# Allegro board GL850_HUB_V10A.brd
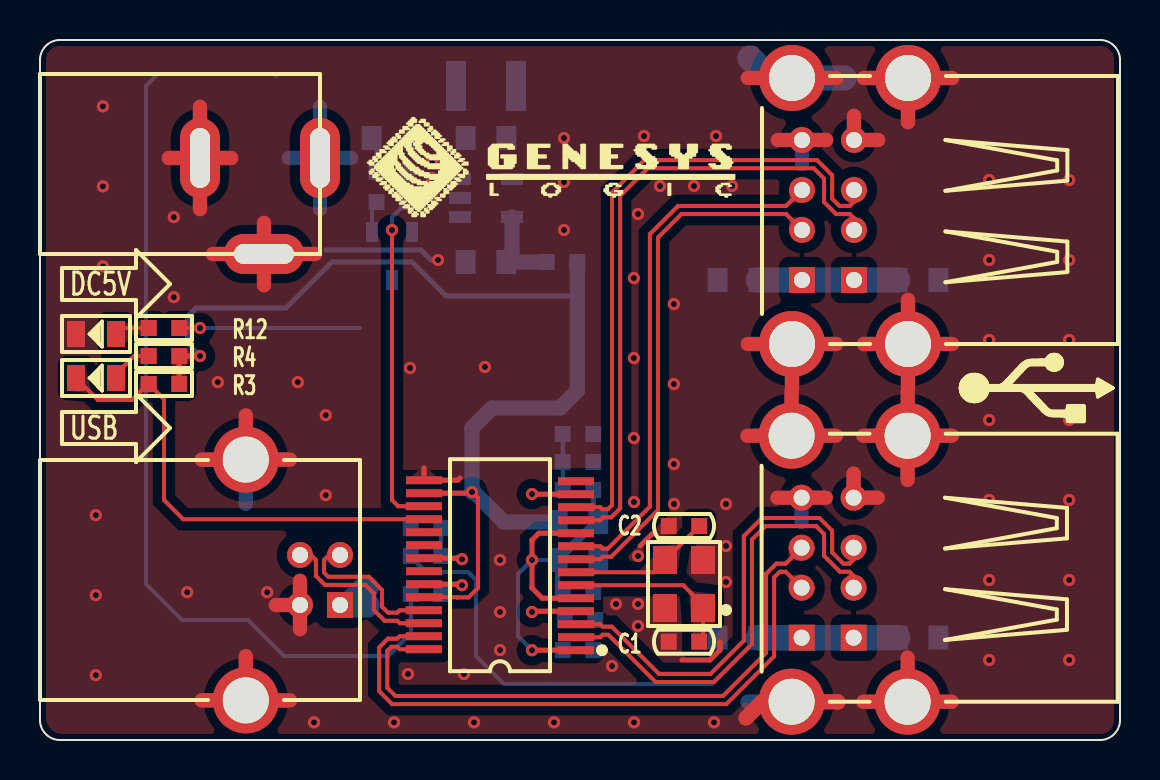
[diagram p0: board, top side]
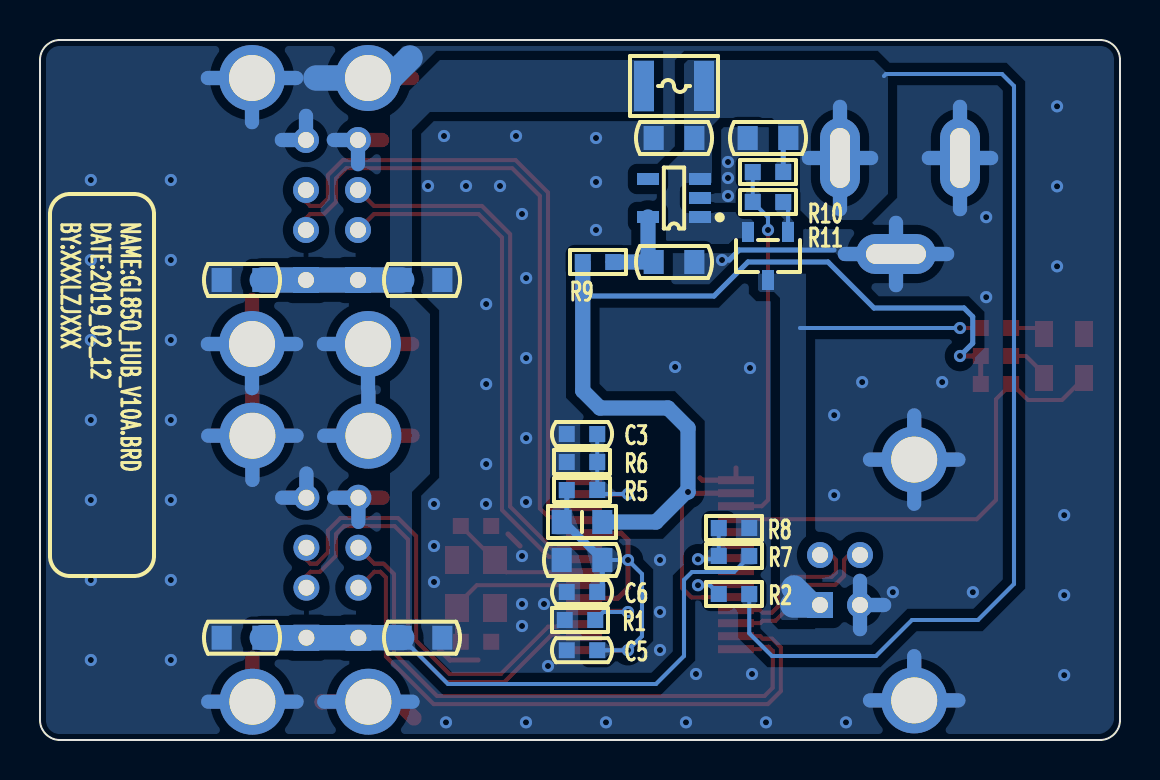
[diagram p1: board, bottom side, seen from below]

Outline 54 x 35 mm; copper layers: TOP, BOTTOM. Coordinates in mm from the lower left corner of the outline.
Outline path: 0,34 arc(0.29,34.71) 1,35 53,35 arc(53.71,34.71) 54,34 54,1 arc(53.71,0.29) 53,0 1,0 arc(0.29,0.29) 0,1 0,34

## Design rules (mm)
constraint set DEFAULT: min track width 0.203, pair gap 0.203
net group DP1: nets DM0 DP0
net group DP2: nets DM1 DP1
net group DP3: nets DM2 DP2
net group DP4: nets DM3 DP3
net group DP5: nets DM4 DP4

## Placement (name value [footprint] x y rotation side)
C1  20pF_25V  [C0603]  32.2 4.91 0 top
C2  20pF_25V  [C0603]  32.2 10.7 0 top
C3  0.1uF_25V  [C0603]  26.9 15.3 180 bottom
C4  10uF_25V  [C0805]  26.9 9 0 bottom
C5  0.1uF_25V  [C0603]  26.9 4.49 180 bottom
C6  0.1uF_25V  [C0603]  26.9 7.4 180 bottom
C7  10uF_25V  [C0805]  34.9 23 180 bottom
C8  10uF_25V  [C0805]  43.9 23 0 bottom
C9  10uF_25V  [C0805]  34.9 5.11 180 bottom
C10  10uF_25V  [C0805]  43.9 5.11 0 bottom
C11  10uF_25V  [C0805]  17.6 30.1 0 bottom
C12  10uF_25V  [C0805]  22.3 30.1 0 bottom
C13  10uF_25V  [C0805]  22.3 23.9 180 bottom
D1  LED_GREEN  [LED0805]  2.8 18.1 180 top
D2  LED_GREEN  [LED0805]  2.8 20.3 180 top
DC1  -  [DC005]  8 29.1 0 top
F1  SMD1210-200  [FUSE1210]  22.3 32.7 180 bottom
L1  BLM21PG600  [L0805]  26.9 10.9 180 bottom
NOREF  -  []  0 0 90 top
NOREF#2  -  []  0 0 0 top
Q1  AO3415  [SOT23-3]  17.6 24.2 0 bottom
R1  680R  [R0603]  27 6 180 bottom
R2  0R/NI  [R0603]  19.3 7.3 180 bottom
R3  100K  [R0603]  6.2 17.8 0 top
R4  10K  [R0603]  6.2 19.2 0 top
R5  10K  [R0603]  26.9 12.5 180 bottom
R6  47K  [R0603]  26.9 13.9 180 bottom
R7  30K  [R0603]  19.3 9.2 180 bottom
R8  30K  [R0603]  19.3 10.6 0 bottom
R9  0R  [R0603]  26.1 23.9 0 bottom
R10  510K  [R0603]  17.6 28.4 180 bottom
R11  4.7K  [R0603]  17.6 26.9 180 bottom
R12  10K  [R0603]  6.2 20.6 0 top
U1  X322512MSB4SI  [X-4P-3R2X2R5-SMD]  32.2 7.8 90 top
U2  GL850G  [SSOP28]  23 8.74 90 top
U3  SPX3819M5-L-3-3/TR  [SOT23-5]  22.3 27.1 90 bottom
USB1  -  [USB-A-DOUBLE]  38.1 26.5 0 top
USB2  -  [USB-A-DOUBLE]  38.08 8.61 0 top
USB3  -  [USB-B]  15 8 180 top

## Library data of the parts
C1 C2 C7-C13 = CAP NP_2
C3 C5 C6 = CAP NP
C4 = C_Generic
D1 D2 = LED_4
DC1 = DC005
F1 = FUSE
L1 = IND_BEAD_0805_600OHM_200MA
Q1 = MOS-P_0
R1-R12 = R_Generic
U1 = TSX-3225
U2 = GL850G
U3 = SPX3819M5-L-1-2
USB1 USB2 = USB-A-DOUBLE
USB3 = USB-B

## Footprints (pads in the part's own frame, mm; a bottom-side part is the same pattern mirrored in y, then rotated)
C0603
  rect 0.8x0.8 smd: 1(-0.762,0) 2(0.762,0)
C0805
  rect 1x1.2 smd: 1(-1.016,0) 2(1.016,0)
DC005
  oval 2x4 hole 1x3: 1(6,0) 2(0,0)
  oval 4x2 hole 3x1: 3(3.2,-4.8)
FUSE1210
  rect 1x2.5 smd: 1(-1.5,0) 2(1.5,0)
L0805
  rect 1x1.2 smd: 1(-1.016,0) 2(1.016,0)
LED0805
  rect 0.9x1.3 smd: 1(-1,0) 2(1,0)
R0603
  rect 0.8x0.8 smd: 1(-0.762,0) 2(0.762,0)
SOT23-3
  rect 0.6x1 smd: 1(-1,-1.2) 2(1,-1.2) 3(0,1.2)
SOT23-5
  rect 0.6x1.1 smd: 1(-0.95,-1.3) 2(0,-1.3) 3(0.95,-1.3) 4(0.95,1.3) 5(-0.95,1.3)
SSOP28
  rect 0.4x1.8 smd: 1(-4.25,-3.8) 2(-3.6,-3.8) 3(-2.95,-3.8) 4(-2.3,-3.8) 5(-1.65,-3.8) 6(-1,-3.8) 7(-0.35,-3.8) 8(0.3,-3.8) 9(0.95,-3.8) 10(1.6,-3.8) 11(2.25,-3.8) 12(2.9,-3.8) 13(3.55,-3.8) 14(4.2,-3.8) 15(4.25,3.8) 16(3.6,3.8) 17(2.95,3.8) 18(2.3,3.8) 19(1.65,3.8) 20(1,3.8) 21(0.35,3.8) 22(-0.3,3.8) 23(-0.95,3.8) 24(-1.6,3.8) 25(-2.25,3.8) 26(-2.9,3.8) 27(-3.55,3.8) 28(-4.2,3.8)
USB-A-DOUBLE
  rect 1.3x1.3 hole 0.8: 1(2.6,-3.5) 5(0,-3.5)
  round 1.3 hole 0.8: 2(2.6,-1) 3(2.6,1) 4(2.6,3.5) 6(0,-1) 7(0,1) 8(0,3.5)
  round 3.3 hole 2.3: 9(-0.5,6.6) 10(5.3,6.6) 11(5.3,-6.7) 12(-0.5,-6.7)
USB-B
  rect 1.3x1.3 hole 0.8: 1(0,1.25)
  round 1.3 hole 0.8: 2(0,-1.25) 3(2,-1.25) 4(2,1.25)
  round 3.3 hole 2.3: 5(4.71,6.02) 6(4.71,-6.02)
X-4P-3R2X2R5-SMD
  rect 1.4x1.2 smd: 1(-1.2,-0.95) 2(1.2,-0.95) 3(1.2,0.95) 4(-1.2,0.95)

## Nets
AVDD: C4.1 C5.2 C6.2 L1.1 R5.1 U2.1 U2.5 U2.10
DVDD: L1.2(B) R3.2 R4.2 R9.2 U2.16 U2.24
GND: C1.1 C2.1 C3.1 C4.2 C5.1 C6.1 C7.2 C8.2 C9.2 C10.2 C11.2 C12.2 C13.2 D2.2(CATHODE) DC1.2 DC1.3 R1.1 R6.1 R8.1 U1.2 U1.4 U2.15 U3.2 USB1.4 USB1.8 USB1.9 USB1.10 USB1.11 USB1.12 USB2.4 USB2.8 USB2.9 USB2.10 USB2.11 USB2.12 USB3.4 USB3.5 USB3.6
VCC: C11.1 C12.1 DC1.1 F1.2 Q1.2(S) R2.2 R10.2 U3.1 U3.3
VCC_VOUT1: C7.1 C8.1 C9.1 C10.1 F1.1 R7.2 USB1.1 USB1.5(VCC_2) USB2.1 USB2.5(VCC_2)
B_VCC: Q1.3 R12.2 USB3.1(VBUS)
DM0: U2.25 USB3.2
DM1: U2.27 USB2.6
DM2: U2.2 USB2.2
DM3: U2.8 USB1.6
DM4: U2.11 USB1.2
DP0: U2.26 USB3.3
DP1: U2.28 USB2.7
DP2: U2.3 USB2.3
DP3: U2.9 USB1.7
DP4: U2.12 USB1.3
OC1#: R7.1 R8.2 U2.21
PGANG: D1.2(CATHODE) R3.1 U2.18
PSELF: R10.1 R11.1 U2.17
RESET#: C3.2 R5.2 R6.2 U2.13
X1: C1.2 U1.1 U2.6
X2: C2.2 U1.3(OUT2) U2.7(X2)
N16723357: C13.1 R9.1 U3.5(VOUT)
N16762604: D2.1 R12.1
N16767407: R2.1 U2.23
N16767619: R1.2 U2.4
N16774538: Q1.1 R11.2
N16775290: D1.1 R4.1

Pads without a net: U2 14 19 20 22; U3 4

## Via types
v1: diameter 0.61, hole 0.305, TOP to BOTTOM, 80 vias

## Routing (per net, layer and track width the routed paths; a pad name or vN(x,y) marks a point on that pad's centre or on a via; arc(x,y) is an arc through that point)
AVDD: length 23.5
  TOP w0.254: U2.5 25.11,7.09 24.6,7.6 v1(24.6,9) 24.6,10 24.94,10.34 U2.10 ; U2.1 v1(24.6,4.49)
  BOTTOM w0.203: C4.1 v1(24.6,9) 23.9,8.3 23.9,5.19 v1(24.6,4.49) C5.2
  BOTTOM w0.254: C4.1 25.88,7.65 C6.2 ; R5.1 27.66,11.25 27.92,11 L1.1
  BOTTOM w0.4: C4.1 27.78,10.9 L1.1
DVDD: length 56.8
  TOP w0.203: v1(21.6,12.4) 21.9,12.1 21.9,7.6 21.43,7.13 20.85,7.13 20.84,7.14 U2.24
  TOP w0.254: R3.2 R4.2 v1(8,19.2) ; v1(21.6,12.4) 21.54,12.34 U2.16
  BOTTOM w0.254: v1(8,19.2) 7.37,19.84 7.37,21.16 7.8,21.6 12.3,21.6 14.6,23.9 18.6,23.9 20.3,22.2 26.86,22.2
  BOTTOM w0.762: R9.2 26.86,17.46 26,16.6 22.6,16.6 21.6,15.6 v1(21.6,12.4) 21.7,12.4 23.2,10.9 L1.2
GND: length 196.1
  TOP w0.254: 19.2,13.6 U2.15 20.89,12.99 21,13.1 ; 34,4.9 34,4.5 33.5,4 32.1,4 ; 30.6,10.3 30,9.7
  TOP w0.711: 41.89,12.11 USB2.4 40.68,13.32 ; 8.08,1.98 USB3.5 ; USB3.5 10.29,4.19 ; USB3.5 12.5,1.98 ; USB2.11 43.38,4.12 ; USB2.11 45.59,1.91 ; USB2.11 41.17,1.91 ; 8.08,14.02 USB3.6 ; USB3.6 10.29,16.23 ; USB3.6 12.5,14.02 ; 8,26.54 DC1.2 ; DC1.2 6.44,29.1 ; DC1.2 8,31.66 ; DC1.2 9.56,29.1 ; 35.39,33.1 USB1.9 39.81,33.1 ; 40.7,31.21 USB1.4 41.91,30 ; USB1.10 45.61,33.1 ; USB1.10 43.4,30.89 ; USB1.10 41.19,33.1 ; 8.64,24.3 DC1.3 ; DC1.3 11.2,22.74 ; DC1.3 13.76,24.3 ; DC1.3 11.2,25.86 ; 35.37,15.21 USB2.9 ; USB2.9 39.79,15.21 ; USB2.9 37.58,17.42 ; 13,5.54 USB3.4 ; USB3.4 11.79,6.75 ; USB3.4 13,7.96 ; USB2.10 43.38,17.42 ; USB2.10 43.38,13.01 ; USB2.10 45.59,15.21 ; USB2.10 41.17,15.21 ; 41.19,19.8 USB1.11 ; USB1.11 43.4,17.59 ; USB1.11 45.61,19.8 ; USB1.11 43.4,22.01 ; 35.39,19.8 USB1.12 ; USB1.12 37.6,17.59 ; USB1.12 39.81,19.8 ; 39.31,30 USB1.8 36.89,30 ; 39.29,12.11 USB2.8 36.87,12.11
  TOP w0.762: 35.3,1.1 36.11,1.91 USB2.12 39.89,1.91 39.9,1.9
  BOTTOM w0.254: 14.3,24.5 19.04,24.5 19.54,24 v1(19.9,24)
  BOTTOM w0.711: 37.6,17.59 USB1.12 39.81,19.8 ; 10.29,11.81 USB3.6 ; USB3.6 12.5,14.02 ; USB3.6 8.08,14.02 ; USB3.6 10.29,16.23 ; USB2.10 45.59,15.21 ; USB2.10 43.38,13.01 ; USB2.10 41.17,15.21 ; 39.79,1.91 USB2.12 35.37,1.91 ; 40.68,13.32 USB2.4 41.89,12.11 ; 39.29,12.11 USB2.8 38.08,10.91 ; 41.19,19.8 USB1.11 ; USB1.11 43.4,17.59 ; USB1.11 45.61,19.8 ; 6.44,29.1 DC1.2 ; DC1.2 8,31.66 ; DC1.2 8,26.54 ; DC1.2 9.56,29.1 ; USB3.5 12.5,1.98 ; USB3.5 8.08,1.98 ; USB3.5 10.29,4.19 ; 41.17,1.91 USB2.11 45.59,1.91 ; DC1.3 13.76,24.3 ; DC1.3 11.2,22.74 ; DC1.3 11.2,25.86 ; DC1.3 8.64,24.3 ; 11.79,6.75 USB3.4 ; USB3.4 13,7.96 ; USB3.4 13,5.54 ; USB1.10 45.61,33.1 ; USB1.10 41.19,33.1 ; USB1.10 43.4,30.89 ; 40.7,31.21 USB1.4 41.91,30 ; 39.79,15.21 USB2.9 37.58,17.42 ; 39.31,30 USB1.8 38.1,28.79
  BOTTOM w1.27: 35.5,34.1 36.5,33.1 USB1.9 40.2,33.1
  vias: v1(2.79,11.24) v1(2.79,7.24) v1(2.79,3.24) v1(3.15,31.68) v1(3.15,27.68) v1(3.15,23.68) v1(6.69,26.14) v1(6.69,22.14) v1(7.36,7.39) v1(8.89,17.89) v1(11.36,7.39) v1(12.89,17.89) v1(13.7,0.88) v1(14.29,16.24) v1(14.29,12.24) v1(17.7,0.88) v1(18.4,3.3) v1(18.5,18.6) v1(19.6,28.9) v1(19.6,28.1) v1(19.6,27.2) v1(21.2,3.3) v1(21.7,0.88) v1(22.24,18.65) v1(23,9) v1(23,6.4) v1(23,4.5) v1(25.7,0.88) v1(26.2,30.1) v1(26.2,27.9) v1(26.2,25.5) v1(28.6,3.7) v1(28.8,6.8) v1(29.69,23.1) v1(29.69,19.1) v1(29.69,15.1) v1(29.7,11.9) v1(29.7,0.88) v1(29.9,26.3) v1(29.9,9.2) v1(29.9,6.8) v1(29.9,5.7) v1(30.2,30.2) v1(31,27.7) v1(31.69,21.8) v1(31.69,17.8) v1(31.69,13.8) v1(31.7,11.8) v1(32.7,27.7) v1(33.7,0.88) v1(33.8,30.2) v1(34.3,11.8) v1(34.3,9.7) v1(34.3,7.9) v1(34.6,27.7) v1(47.46,28) v1(47.46,24) v1(47.46,20) v1(47.46,16) v1(47.46,12) v1(47.46,8) v1(47.46,4) v1(51.46,28) v1(51.46,24) v1(51.46,20) v1(51.46,16) v1(51.46,12) v1(51.46,8) v1(51.46,4)
VCC: length 58.9
  BOTTOM w0.203: R2.2 18.54,5.34 17.4,4.2 12.2,4.2 10.4,6 7.1,6 5.3,7.8 5.3,32.7 5.9,33.3 11.7,33.3 11.8,33.2
  BOTTOM w0.254: C11.1 16.84,29.85 R10.2
  BOTTOM w0.711: DC1.1 15.56,29.1 ; DC1.1 14,31.66 ; DC1.1 14,26.54 ; DC1.1 12.44,29.1
VCC_VOUT1: length 37.2
  BOTTOM w0.203: C9.1 33.6,2.8 23.2,2.8 21.8,4.2 21.8,8 21.4,8.4 19.3,8.4 18.54,9.16 R7.2
  BOTTOM w1.27: C10.1 USB2.1 USB2.5 C9.1 ; C8.1 USB1.1 USB1.5 C7.1
B_VCC: length 11.6
  TOP w0.203: R12.2 v1(8,20.6)
  BOTTOM w0.203: v1(8,20.6) 16,20.6
  BOTTOM w1.27: 16.35,6.75 15.45,6.75 ; 15.45,6.75 16.3,7.6 ; 15.45,6.75 USB3.1
DM0: length 7.9
  TOP w0.203: USB3.2 14.45,9.25 14.2,9 14.2,8.37 14.41,8.16 16.44,8.16 17.1,7.5 17.1,6.67 17.4,6.37 17.87,6.37 17.99,6.49 U2.25
DM1: length 31.4
  TOP w0.203: U2.27 17.99,5.19 17.87,5.07 17.4,5.07 16.96,4.63 16.96,2.44 17.61,1.79 34.32,1.79 36.71,4.18 36.71,8.13 36.99,8.41 37.28,8.41 USB2.6
DM2: length 23.5
  TOP w0.203: USB2.2 40.68,8.21 40.48,8.41 40,8.41 39.2,9.21 39.2,10.3 38.81,10.69 36.27,10.69 35.6,10.03 35.6,4.8 33.7,2.9 30.78,2.9 28.42,5.26 28.13,5.26 28.01,5.14 U2.2
DM3: length 26.8
  TOP w0.203: U2.8 28.01,9.04 28.13,9.16 28.56,9.16 30.9,11.5 30.9,25.13 32.07,26.3 37.3,26.3 USB1.6
DM4: length 32.7
  TOP w0.203: USB1.2 40.7,26.09 40.5,26.3 39.8,26.3 39.2,26.9 39.2,28.07 38.69,28.59 30.39,28.59 29.01,27.21 29.01,11.57 28.57,11.13 28.15,11.13 28.01,10.99 U2.11
DP0: length 8.6
  TOP w0.203: U2.26 17.99,5.84 17.87,5.96 17.23,5.96 16.69,6.5 16.69,7.33 16.27,7.76 14.24,7.76 13.8,8.2 13.8,9 13.55,9.25 USB3.3
DP1: length 30.1
  TOP w0.203: U2.28 17.99,4.54 17.87,4.66 17.57,4.66 17.37,4.46 17.37,2.61 17.77,2.2 34.15,2.2 36.3,4.35 36.3,8.3 36.82,8.82 37.28,8.82 USB2.7
DP2: length 23.5
  TOP w0.203: U2.3 28.01,5.79 28.13,5.67 28.59,5.67 30.95,3.31 33.53,3.31 35.19,4.97 35.19,10.19 36.1,11.1 38.97,11.1 39.61,10.47 39.61,9.38 40.17,8.82 40.48,8.82 40.68,9.02 USB2.3
DP3: length 26.8
  TOP w0.203: U2.9 28.01,9.69 28.13,9.57 28.39,9.57 30.49,11.67 30.49,25.29 31.9,26.7 37.3,26.7 USB1.7
DP4: length 32.6
  TOP w0.203: USB1.3 40.7,26.91 40.5,26.7 39.97,26.7 39.61,27.07 39.61,28.24 38.85,28.99 30.22,28.99 28.6,27.37 28.6,11.74 28.4,11.54 28.11,11.54 28.01,11.64 U2.12
OC1#: length 4.4
  TOP w0.254: v1(21.1,9.04) 21.05,9.09 U2.21
  BOTTOM w0.203: R8.2 R7.1 20.22,9.04 v1(21.1,9.04)
PGANG: length 23.9
  TOP w0.203: U2.18 7.16,11.04 6.2,12 6.2,17.04 R3.1 5.4,17.8 4.6,17 2.9,17 D1.2
PSELF: length 18.4
  TOP w0.203: U2.17 17.91,11.69 17.6,12 v1(17.6,25.5)
  BOTTOM w0.203: R10.1 R11.1 17.6,26.14 v1(17.6,25.5)
RESET#: length 6.6
  TOP w0.254: v1(24.6,12.3) 24.8,12.3 24.81,12.29 U2.13
  BOTTOM w0.203: v1(24.6,12.3) 25.94,12.3 R5.2 R6.2 C3.2
X1: length 8.7
  TOP w0.203: U2.6 32.16,7.74 33.15,6.75 U1.1 33.15,5.1 C1.2
X2: length 7.1
  TOP w0.203: U2.7 30.69,8.39 31.25,8.95 U1.3 31.26,9 C2.2
N16723357: length 4.4
  BOTTOM w0.762: U3.5 23.6,24.18 C13.1 R9.1
N16762604: length 1.8
  TOP w0.203: D2.1 4.1,20.6 R12.1
N16767407: length 3.1
  TOP w0.254: v1(21.1,7.74) 21.05,7.79 U2.23
  BOTTOM w0.203: R2.1 20.5,7.74 v1(21.1,7.74)
N16767619: length 4
  TOP w0.254: U2.4 24.64,6.44 v1(24.6,6.4)
  BOTTOM w0.203: v1(24.6,6.4) 25.84,6.4 R1.2
N16774538: length 1.6
  BOTTOM w0.203: Q1.1 16.6,26.66 R11.2
N16775290: length 2.2
  TOP w0.203: D1.1 3.8,18.3 4.7,19.2 R4.1

## Copper pours and planes (outline as drawn; the poured copper is in the pictures)
GND on TOP: 1,34.7 0.5,34.5 0.3,34 0.3,1 0.55,0.55 1,0.3 53,0.3 53.5,0.5 53.7,1 53.7,34 53.5,34.5 53,34.7 ; 4 cut-outs
GND on BOTTOM: 1,34.7 0.5,34.5 0.3,34 0.3,1 0.55,0.55 1,0.3 53,0.3 53.5,0.5 53.7,1 53.7,34 53.5,34.5 53,34.7 ; 6 cut-outs
VCC on BOTTOM: 11.6,33.3 11.6,27.3 12.9,26 15.5,26 16,26.5 16,29.5 17.1,29.5 17.1,30.8 17.4,31.1 20,31.1 20.4,30.7 20.4,27.8 21.8,27.8 22,27.6 22,26.7 21.7,26.4 18.8,26.4 18.3,25.9 18.3,24.8 22.5,24.8 22.7,25 22.7,28.6 21.8,29.5 21.8,33.8 21.6,34 12.3,34
VCC_VOUT1 on BOTTOM: 23.3,31.4 23.3,34 34,34 36.5,31.5 36.5,4.5 35.4,4.5 35.4,12.4 34.5,13.3 34.5,21.3 35.4,22.2 35.4,30.5 34.5,31.4
B_VCC on BOTTOM: 18,23.7 16,23.7 15.7,23.4 15.7,6 16.9,6 17,6.1 17,22.1 17.3,22.4 18,22.4 18.1,22.5 18.1,23.6

Small or netless copper shapes (teardrops, artwork), in the pictures only: 61 on TOP, 35 on BOTTOM

## Text on the board
Ref Des/Silkscreen Bottom: NAME:GL850_HUB_V10A.BRD | DATE:2019_02_12 | BY:XXXLZJXXX
Ref Des/Silkscreen Top: DC5V | USB
DISPLAY_TOP: FIGURE | FINISHED_SIZE | 0.3048 | 0.8 | 2.3 | 3.0x1.0 | DRILL CHART: TOP to BOTTOM | ALL UNITS ARE IN MILLIMETERS | ROTATION | - | 90.000 | 0.000 | PLATED | QTY | 80 | 20 | 10 | 2 | 1 | 113 | TOTAL HOLES:
